# EAGLE board balancebot_1 (EAGLE 9.6.2)
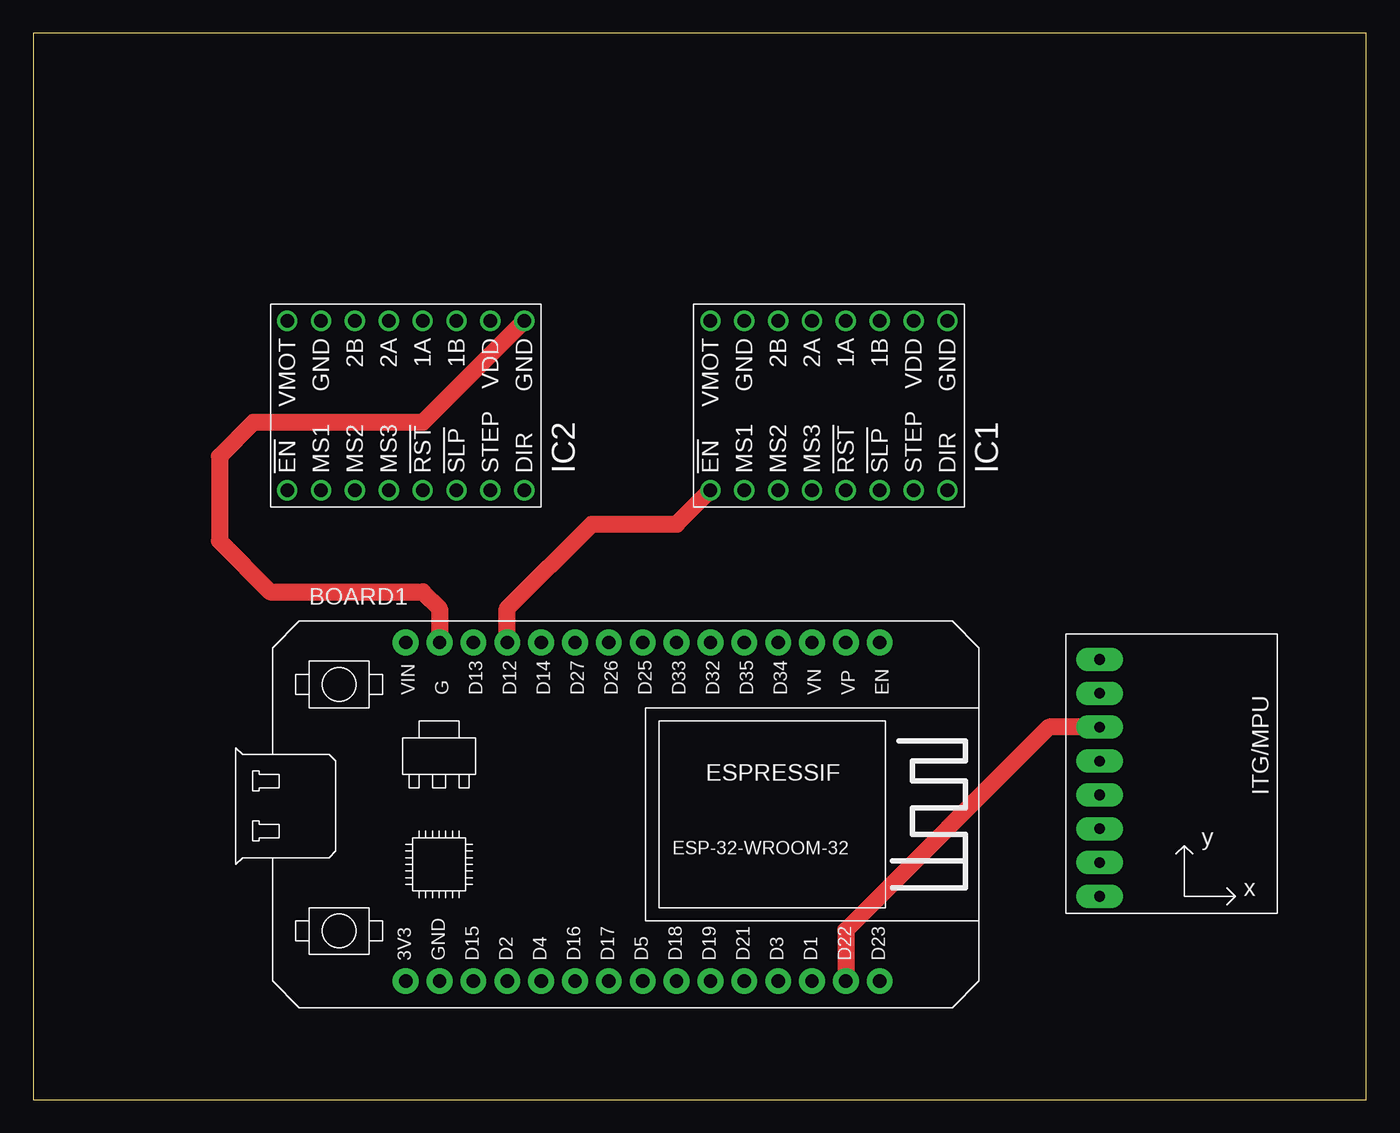
[diagram p0: board, top side]
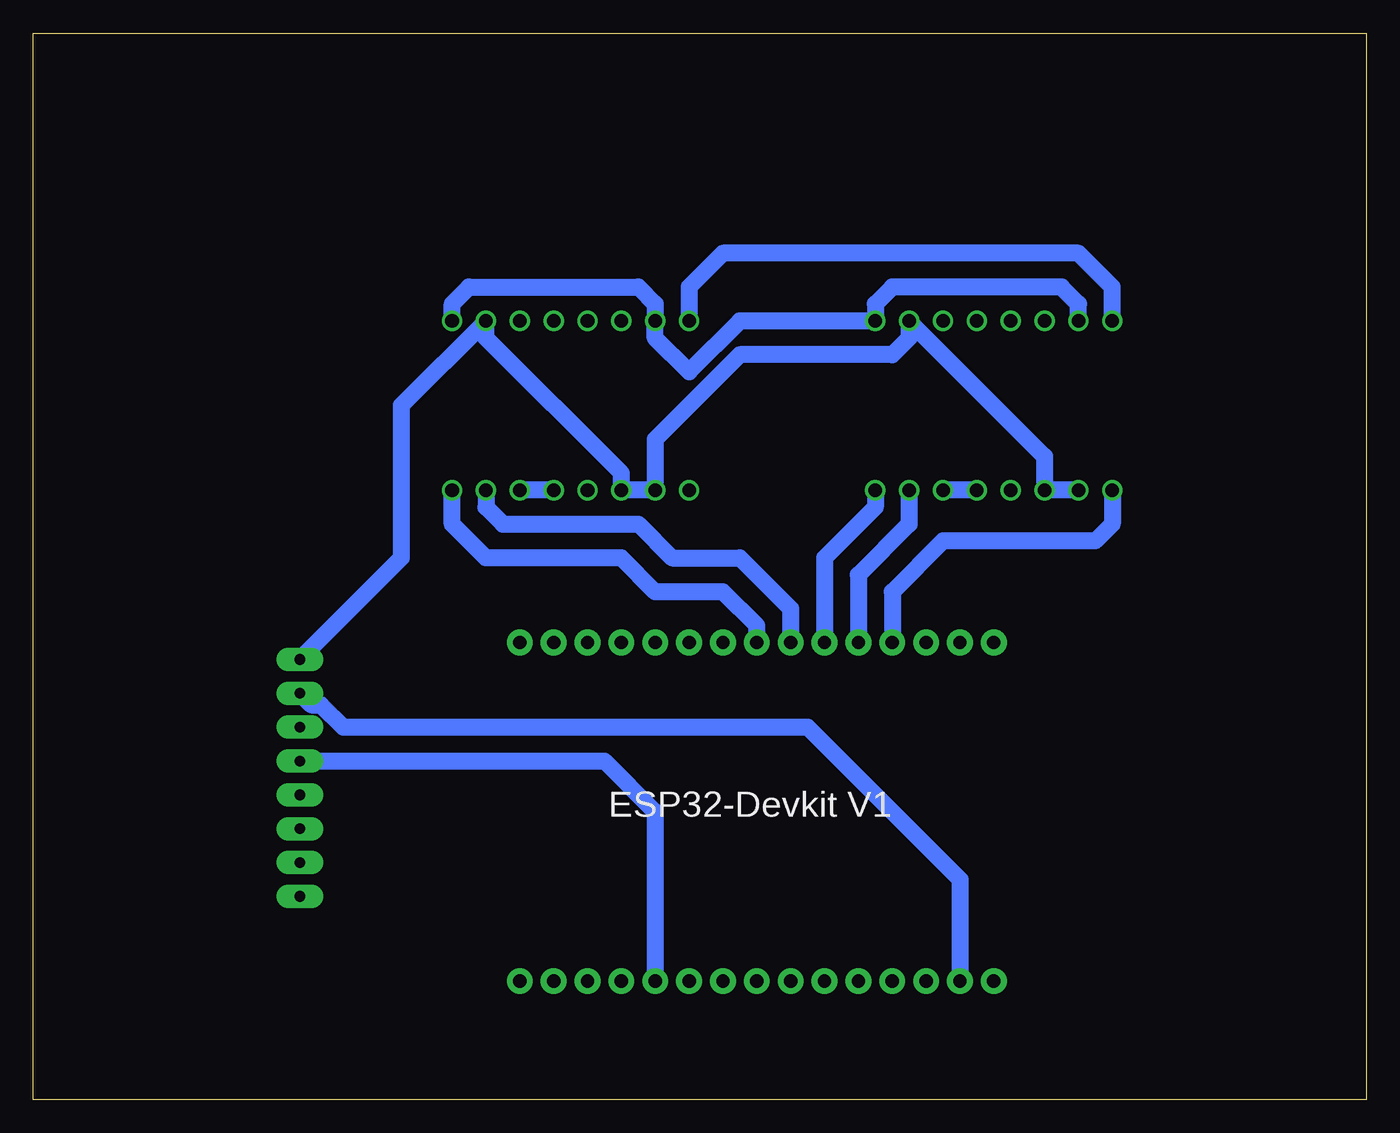
[diagram p1: board, bottom side, seen from below]

Size 100 x 80 mm. Coordinates in mm from the lower left corner, seen from the top.
Outline: 0,0 100,0 100,80 0,80 0,0
Copper layers (1*16): Top 0.035mm / dielectric 1.5mm / Bottom 0.035mm
Design rules "default": minimum track width 6mil, minimum drill 0.35mm, track to track 6mil, track to pad 6mil, pad to pad 6mil, via to via 6mil, smd to smd 6mil, copper to edge 40mil, drill to drill 6mil, minimum pad ring 10mil, minimum via ring 8mil, stop-mask expansion 4mil, vias tented up to drill 0mil, thermal gap 10mil

## Footprints (pad centres in the part's own frame; a part is rotated, then mirrored left to right if it is on the bottom)
ESP32-DEVKITV1 = drill 1 pad 1.93: 3V3 0,0; D1 30.48,0; D2 7.62,0; D3 27.94,0; D4 10.16,0; D5 17.78,0; D12 7.62,25.4; D13 5.08,25.4; D14 10.16,25.4; D15 5.08,0; D16 12.7,0; D17 15.24,0; D18 20.32,0; D19 22.86,0; D21 25.4,0; D22 33.02,0; D23 35.56,0; D25 17.78,25.4; D26 15.24,25.4; D27 12.7,25.4; D32 22.86,25.4; D33 20.32,25.4; D34 27.94,25.4; D35 25.4,25.4; EN 35.56,25.4; GND 2.54,25.4; GND@1 2.54,0; VIN 0,25.4; VN 30.48,25.4; VP 33.02,25.4
A4988 = drill 1.016: 1 -6.35,8.89; 2 -6.35,6.35; 3 -6.35,3.81; 4 -6.35,1.27; 5 -6.35,-1.27; 6 -6.35,-3.81; 7 -6.35,-6.35; 8 -6.35,-8.89; 9 6.35,-8.89; 10 6.35,-6.35; 11 6.35,-3.81; 12 6.35,-1.27; 13 6.35,1.27; 14 6.35,3.81; 15 6.35,6.35; 16 6.35,8.89
GY-521 = drill 0.8 pad 1.778 long: ADO -8.89,-6.35; GND -8.89,6.35; INT -8.89,-8.89; SCL -8.89,3.81; SDA -8.89,1.27; VCC -8.89,8.89; XCL -8.89,-3.81; XDA -8.89,-1.27

## Placement (x,y rotation side)
BOARD1  ESP32DEVKITV1  [ESP32-DEVKITV1]  27.94,8.89 0 top
IC1  1182-A4988  [A4988]  59.69,52.07 90 top
IC2  1182-A4988  [A4988]  27.94,52.07 90 top
U1  GY-521MPU6050  [GY-521]  88.9,24.13 0 top

## Library data of the parts
BOARD1 = ESP32-DEVKITV1
IC1 IC2 = pololu-stepper-driver
U1 = gy-521

## Nets
N$1: BOARD1.GND IC1.9 IC1.15 IC2.9 IC2.15
N$2: BOARD1.D12 IC1.1 IC2.1
N$3: BOARD1.D14 IC2.7
N$4: IC1.16 IC2.16
N$5: BOARD1.D27 IC2.8
N$6: BOARD1.D25 IC1.8
N$7: BOARD1.D26 IC1.7
N$8: IC1.2 IC1.3 IC1.10 IC2.2 IC2.3 IC2.10 U1.VCC
N$9: IC1.5 IC1.6
N$10: IC2.5 IC2.6
N$12: BOARD1.GND@1 U1.GND
N$13: BOARD1.D22 U1.SCL
N$14: BOARD1.D21 U1.SDA

## Tracks (layer width: path | path; a pad name or v marks a point on that pad's centre or on a via)
N$1
  Top 1.27: IC2.9 29.21,50.8 16.51,50.8 13.97,48.26 13.97,41.91 17.78,38.1 29.21,38.1 30.48,36.83 BOARD1.GND
  Bottom 1.27: IC2.15 21.59,59.69 22.86,60.96 35.56,60.96 36.83,59.69 IC2.9 46.99,58.42 50.8,54.61 53.34,57.15 IC1.15 53.34,59.69 54.61,60.96 67.31,60.96 68.58,59.69 IC1.9
N$2
  Top 1.27: BOARD1.D12 35.56,36.83 41.91,43.18 48.26,43.18 IC1.1
  Bottom 1.27: IC2.1 19.05,43.18 20.32,41.91 31.75,41.91 35.56,38.1 BOARD1.D12
N$3
  Bottom 1.27: IC2.7 34.29,43.18 38.1,39.37 BOARD1.D14
N$4
  Bottom 1.27: IC2.16 19.05,60.96 21.59,63.5 48.26,63.5 50.8,60.96 IC1.16
N$5
  Bottom 1.27: IC2.8 36.83,44.45 40.64,40.64 BOARD1.D27
N$6
  Bottom 1.27: BOARD1.D25 45.72,35.56 48.26,38.1 53.34,38.1 55.88,40.64 66.04,40.64 68.58,43.18 IC1.8
N$7
  Bottom 1.27: IC1.7 66.04,44.45 64.77,43.18 54.61,43.18 52.07,40.64 46.99,40.64 43.18,36.83 BOARD1.D26
N$8
  Bottom 1.27: IC2.2 IC2.3 24.13,48.26 IC2.10 34.29,57.15 35.56,55.88 46.99,55.88 53.34,49.53 IC1.2 IC1.3 55.88,46.99 66.04,57.15 IC1.10 72.39,52.07 72.39,40.64 U1.VCC
N$9
  Bottom 1.27: IC1.5 IC1.6
N$10
  Bottom 1.27: IC2.5 IC2.6
N$12
  Bottom 1.27: U1.GND 79.15,29.62 78.43,29.62 76.75,27.94 41.91,27.94 30.48,16.51 BOARD1.GND@1
N$13
  Top 1.27: U1.SCL 76.2,27.94 60.96,12.7 BOARD1.D22
N$14
  Bottom 1.27: U1.SDA 57.15,25.4 53.34,21.59 BOARD1.D21